# Altium PCB PCB1.PcbDoc (part 2 of 2)
Units mm, origin at the board's own origin, x right, y up, seen from the top; angles counter-clockwise.
Board outline 54.61 x 46.35 mm, 4 copper layers (Top Layer, Layer 1, Layer 2, Bottom Layer), stack 1.587 mm thick; 183 components, 132 nets, 434 pads, 125 vias.
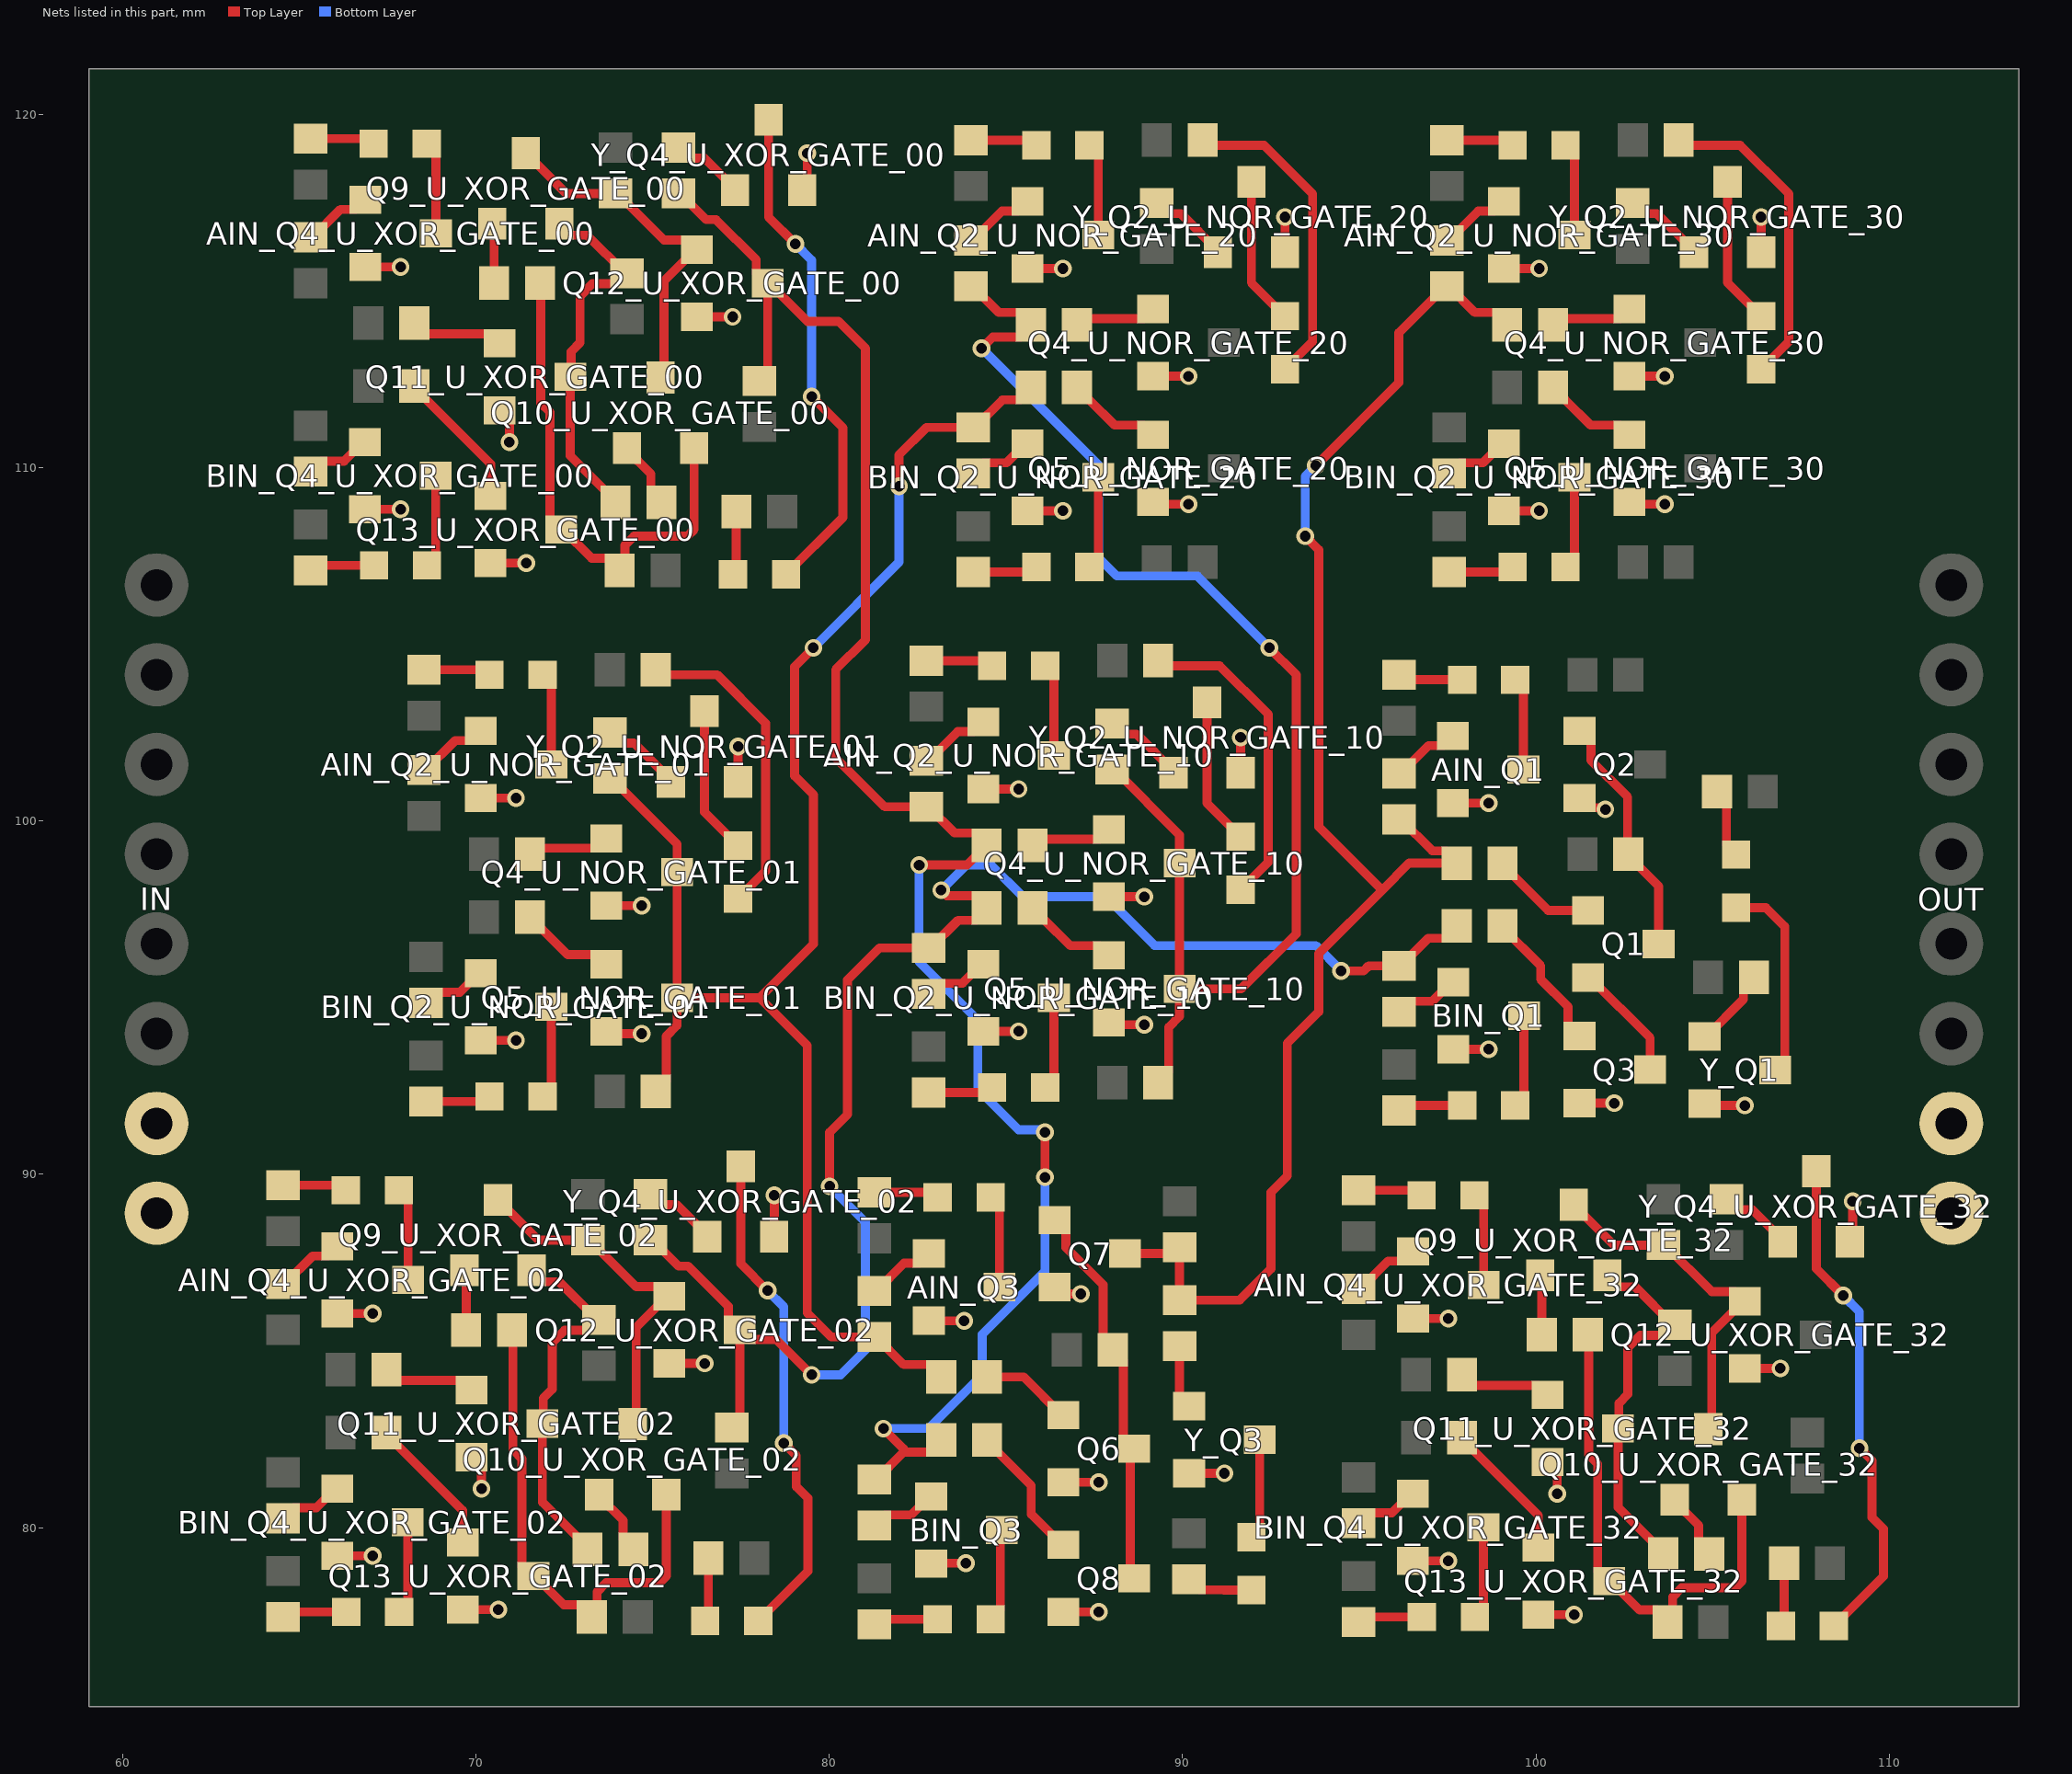
[diagram p4: the nets of this part, all layers, seen from the top]

## Via types
v1: diameter 0.5, hole 0.3, Top Layer to Bottom Layer, 125 vias

## Nets (pads, with @x,y where several pads share a name; then routed paths per layer and width w, separated by ;. In a path a pad name is that pad's centre, name@x,y a point inside that pad or via, vN(x,y) a via of type N, cw(c..) or ccw(c..) an arc to the next point about the centre after c; other vN are vias at no path point) (continued)
GND: AIN_Q1.2 AIN_Q2_U_NOR_GATE_01.2 AIN_Q2_U_NOR_GATE_10.2 AIN_Q2_U_NOR_GATE_20.2 AIN_Q2_U_NOR_GATE_30.2 AIN_Q3.2 AIN_Q4_U_XOR_GATE_00.2 AIN_Q4_U_XOR_GATE_02.2 AIN_Q4_U_XOR_GATE_32.2 BIN_Q1.2 BIN_Q2_U_NOR_GATE_01.2 BIN_Q2_U_NOR_GATE_10.2 BIN_Q2_U_NOR_GATE_20.2 BIN_Q2_U_NOR_GATE_30.2 BIN_Q3.2 BIN_Q4_U_XOR_GATE_00.2 BIN_Q4_U_XOR_GATE_02.2 BIN_Q4_U_XOR_GATE_32.2 IN.7 IN.8 OUT.7 OUT.8 Q2.2 Q3.2 Q4_U_NOR_GATE_01.2 Q4_U_NOR_GATE_10.2 Q4_U_NOR_GATE_20.2 Q4_U_NOR_GATE_30.2 Q5_U_NOR_GATE_01.2 Q5_U_NOR_GATE_10.2 Q5_U_NOR_GATE_20.2 Q5_U_NOR_GATE_30.2 Q6.2 Q7.2 Q8.2 Q11_U_XOR_GATE_00.2 Q11_U_XOR_GATE_02.2 Q11_U_XOR_GATE_32.2 Q12_U_XOR_GATE_00.2 Q12_U_XOR_GATE_02.2 Q12_U_XOR_GATE_32.2 Q13_U_XOR_GATE_00.2 Q13_U_XOR_GATE_02.2 Q13_U_XOR_GATE_32.2 Y_Q1.2 Y_Q2_U_NOR_GATE_01.2 Y_Q2_U_NOR_GATE_10.2 Y_Q2_U_NOR_GATE_20.2 Y_Q2_U_NOR_GATE_30.2 Y_Q3.2 Y_Q4_U_XOR_GATE_00.2 Y_Q4_U_XOR_GATE_02.2 Y_Q4_U_XOR_GATE_32.2 | length 49.5
  Top Layer w0.254: BIN_Q4_U_XOR_GATE_02.2@66.072,79.202 v1(67.08,79.202) ; AIN_Q4_U_XOR_GATE_02.2@66.08,86.06 v1(67.08,86.06) ; BIN_Q4_U_XOR_GATE_00.2@66.86,108.824 v1(67.868,108.824) ; AIN_Q4_U_XOR_GATE_00.2@66.868,115.682 v1(67.868,115.682) ; Q13_U_XOR_GATE_02.2@69.628,77.678 v1(70.636,77.678) ; Q11_U_XOR_GATE_02.2@69.882,81.996 69.887,81.996 70.16,81.723 v1(70.16,81.102) ; BIN_Q2_U_NOR_GATE_01.2@70.136,93.792 v1(71.136,93.792) ; AIN_Q2_U_NOR_GATE_01.2@70.136,100.65 v1(71.136,100.65) ; Q13_U_XOR_GATE_00.2@70.416,107.3 v1(71.424,107.3) ; Q11_U_XOR_GATE_00.2@70.67,111.618 70.675,111.618 70.948,111.345 v1(70.948,110.724) ; Q5_U_NOR_GATE_01.2@73.692,94.046 73.758,93.98 v1(74.692,93.98) ; Q4_U_NOR_GATE_01.2@73.692,97.602 v1(74.692,97.602) ; Q12_U_XOR_GATE_02.2@75.47,84.648 v1(76.478,84.648) ; Q12_U_XOR_GATE_00.2@76.258,114.27 v1(77.266,114.27) ; Y_Q2_U_NOR_GATE_01.2@77.42,101.108 v1(77.42,102.108) ; Y_Q4_U_XOR_GATE_02.2@78.444,88.23 78.436,88.238 78.444,88.246 v1(78.444,89.408) ; Y_Q4_U_XOR_GATE_00.2@79.232,117.852 79.224,117.86 79.379,118.015 v1(79.379,118.902) ; AIN_Q3.2@82.82,85.856 82.824,85.852 v1(83.82,85.852) ; BIN_Q3.2@82.886,78.982 82.898,78.994 v1(83.866,78.994) ; BIN_Q2_U_NOR_GATE_10.2@84.36,94.046 v1(85.36,94.046) ; AIN_Q2_U_NOR_GATE_10.2@84.36,100.904 v1(85.36,100.904) ; BIN_Q2_U_NOR_GATE_20.2@85.614,108.778 v1(86.614,108.778) ; AIN_Q2_U_NOR_GATE_20.2@85.614,115.636 v1(86.614,115.636) ; Q7.2@86.376,86.806 86.568,86.614 v1(87.122,86.614) ; Q8.2@86.63,77.616 v1(87.63,77.616) ; Q6.2@86.63,81.284 v1(87.63,81.284) ; Q5_U_NOR_GATE_10.2@87.916,94.3 87.982,94.234 v1(88.916,94.234) ; Q4_U_NOR_GATE_10.2@87.916,97.856 v1(88.916,97.856) ; Q5_U_NOR_GATE_20.2@89.17,109.032 89.236,108.966 v1(90.17,108.966) ; Q4_U_NOR_GATE_20.2@89.17,112.588 v1(90.17,112.588) ; Y_Q3.2@90.186,81.538 v1(91.186,81.538) ; Y_Q2_U_NOR_GATE_10.2@91.644,101.362 v1(91.644,102.362) ; Y_Q2_U_NOR_GATE_20.2@92.898,116.094 v1(92.898,117.094) ; BIN_Q4_U_XOR_GATE_32.2@96.516,79.06 v1(97.524,79.06) ; AIN_Q4_U_XOR_GATE_32.2@96.524,85.918 v1(97.524,85.918) ; AIN_Q1.2@97.648,100.508 v1(98.664,100.508) ; BIN_Q1.2@97.664,93.538 v1(98.664,93.538) ; BIN_Q2_U_NOR_GATE_30.2@99.092,108.778 v1(100.092,108.778) ; AIN_Q2_U_NOR_GATE_30.2@99.092,115.636 v1(100.092,115.636) ; Q13_U_XOR_GATE_32.2@100.072,77.536 v1(101.08,77.536) ; Q11_U_XOR_GATE_32.2@100.326,81.854 100.331,81.854 100.604,81.581 v1(100.604,80.96) ; Q3.2@101.236,92.014 v1(102.22,92.014) ; Q2.2@101.236,100.65 101.509,100.377 101.919,100.377 v1(101.966,100.33) ; Q5_U_NOR_GATE_30.2@102.648,109.032 102.714,108.966 v1(103.648,108.966) ; Q4_U_NOR_GATE_30.2@102.648,112.588 v1(103.648,112.588) ; Y_Q1.2@104.776,92.002 104.788,92.014 104.854,91.948 v1(105.914,91.948) ; Q12_U_XOR_GATE_32.2@105.914,84.506 v1(106.922,84.506) ; Y_Q2_U_NOR_GATE_30.2@106.376,116.094 v1(106.376,117.094) ; Y_Q4_U_XOR_GATE_32.2@108.888,88.088 108.88,88.096 108.966,88.182 v1(108.966,89.234)
NetAIN_D1_1: AIN_D1.1 AIN_RD1.2 | length 1.8
  Top Layer w0.254: AIN_RD1.2@96.124,104.14 96.266,103.998 AIN_D1.1@97.914,103.998
NetAIN_D1_2: AIN_D1.2 AIN_Q1.3 | length 2.6
  Top Layer w0.254: AIN_D1.2@99.414,103.998 99.648,103.764 AIN_Q1.3@99.648,101.458
NetAIN_D2_U_NOR_GATE_01_1: AIN_D2_U_NOR_GATE_01.1 AIN_RD2_U_NOR_GATE_01.2 | length 1.9
  Top Layer w0.254: AIN_RD2_U_NOR_GATE_01.2@68.53,104.282 70.244,104.282 AIN_D2_U_NOR_GATE_01.1@70.386,104.14
NetAIN_D2_U_NOR_GATE_01_2: AIN_D2_U_NOR_GATE_01.2 AIN_Q2_U_NOR_GATE_01.3 | length 2.6
  Top Layer w0.254: AIN_D2_U_NOR_GATE_01.2@71.886,104.14 72.136,103.89 AIN_Q2_U_NOR_GATE_01.3@72.136,101.6
NetAIN_D2_U_NOR_GATE_10_1: AIN_D2_U_NOR_GATE_10.1 AIN_RD2_U_NOR_GATE_10.2 | length 1.9
  Top Layer w0.254: AIN_RD2_U_NOR_GATE_10.2@82.754,104.536 84.468,104.536 AIN_D2_U_NOR_GATE_10.1@84.61,104.394
NetAIN_D2_U_NOR_GATE_10_2: AIN_D2_U_NOR_GATE_10.2 AIN_Q2_U_NOR_GATE_10.3 | length 2.6
  Top Layer w0.254: AIN_D2_U_NOR_GATE_10.2@86.11,104.394 86.36,104.144 AIN_Q2_U_NOR_GATE_10.3@86.36,101.854
NetAIN_D2_U_NOR_GATE_20_1: AIN_D2_U_NOR_GATE_20.1 AIN_RD2_U_NOR_GATE_20.2 | length 1.9
  Top Layer w0.254: AIN_RD2_U_NOR_GATE_20.2@84.008,119.268 85.722,119.268 AIN_D2_U_NOR_GATE_20.1@85.864,119.126
NetAIN_D2_U_NOR_GATE_20_2: AIN_D2_U_NOR_GATE_20.2 AIN_Q2_U_NOR_GATE_20.3 | length 2.6
  Top Layer w0.254: AIN_D2_U_NOR_GATE_20.2@87.364,119.126 87.614,118.876 AIN_Q2_U_NOR_GATE_20.3@87.614,116.586
NetAIN_D2_U_NOR_GATE_30_1: AIN_D2_U_NOR_GATE_30.1 AIN_RD2_U_NOR_GATE_30.2 | length 1.9
  Top Layer w0.254: AIN_RD2_U_NOR_GATE_30.2@97.486,119.268 99.2,119.268 AIN_D2_U_NOR_GATE_30.1@99.342,119.126
NetAIN_D2_U_NOR_GATE_30_2: AIN_D2_U_NOR_GATE_30.2 AIN_Q2_U_NOR_GATE_30.3 | length 2.6
  Top Layer w0.254: AIN_D2_U_NOR_GATE_30.2@100.842,119.126 101.092,118.876 AIN_Q2_U_NOR_GATE_30.3@101.092,116.586
NetAIN_D3_1: AIN_D3.1 AIN_RD3.2 | length 1.8
  Top Layer w0.254: AIN_RD3.2@81.28,89.488 82.928,89.488 AIN_D3.1@83.07,89.346
NetAIN_D3_2: AIN_D3.2 AIN_Q3.3 | length 2.6
  Top Layer w0.254: AIN_D3.2@84.57,89.346 84.82,89.096 AIN_Q3.3@84.82,86.806
NetAIN_D4_U_XOR_GATE_00_1: AIN_D4_U_XOR_GATE_00.1 AIN_RD4_U_XOR_GATE_00.2 | length 1.8
  Top Layer w0.254: AIN_RD4_U_XOR_GATE_00.2@65.328,119.314 66.964,119.314 AIN_D4_U_XOR_GATE_00.1@67.106,119.172
NetAIN_D4_U_XOR_GATE_00_2: AIN_D4_U_XOR_GATE_00.2 AIN_Q4_U_XOR_GATE_00.3 | length 2.6
  Top Layer w0.254: AIN_D4_U_XOR_GATE_00.2@68.606,119.172 68.868,118.91 AIN_Q4_U_XOR_GATE_00.3@68.868,116.632
NetAIN_D4_U_XOR_GATE_02_1: AIN_D4_U_XOR_GATE_02.1 AIN_RD4_U_XOR_GATE_02.2 | length 1.8
  Top Layer w0.254: AIN_RD4_U_XOR_GATE_02.2@64.54,89.692 66.176,89.692 AIN_D4_U_XOR_GATE_02.1@66.318,89.55
NetAIN_D4_U_XOR_GATE_02_2: AIN_D4_U_XOR_GATE_02.2 AIN_Q4_U_XOR_GATE_02.3 | length 2.6
  Top Layer w0.254: AIN_D4_U_XOR_GATE_02.2@67.818,89.55 68.08,89.288 AIN_Q4_U_XOR_GATE_02.3@68.08,87.01
NetAIN_D4_U_XOR_GATE_32_1: AIN_D4_U_XOR_GATE_32.1 AIN_RD4_U_XOR_GATE_32.2 | length 1.8
  Top Layer w0.254: AIN_RD4_U_XOR_GATE_32.2@94.984,89.55 96.62,89.55 AIN_D4_U_XOR_GATE_32.1@96.762,89.408
NetAIN_D4_U_XOR_GATE_32_2: AIN_D4_U_XOR_GATE_32.2 AIN_Q4_U_XOR_GATE_32.3 | length 2.6
  Top Layer w0.254: AIN_D4_U_XOR_GATE_32.2@98.262,89.408 98.524,89.146 AIN_Q4_U_XOR_GATE_32.3@98.524,86.868
NetAIN_Q1_1: AIN_Q1.1 AIN_R1.1 | length 2
  Top Layer w0.254: AIN_R1.1@96.124,101.346 96.174,101.346 96.963,102.135 97.375,102.135 AIN_Q1.1@97.648,102.408
NetAIN_Q2_U_NOR_GATE_01_1: AIN_Q2_U_NOR_GATE_01.1 AIN_R2_U_NOR_GATE_01.1 | length 2.1
  Top Layer w0.254: AIN_R2_U_NOR_GATE_01.1@68.53,101.446 68.58,101.446 69.411,102.277 69.863,102.277 AIN_Q2_U_NOR_GATE_01.1@70.136,102.55
NetAIN_Q2_U_NOR_GATE_10_1: AIN_Q2_U_NOR_GATE_10.1 AIN_R2_U_NOR_GATE_10.1 | length 2.1
  Top Layer w0.254: AIN_R2_U_NOR_GATE_10.1@82.754,101.7 82.804,101.7 83.635,102.531 84.087,102.531 AIN_Q2_U_NOR_GATE_10.1@84.36,102.804
NetAIN_Q2_U_NOR_GATE_20_1: AIN_Q2_U_NOR_GATE_20.1 AIN_R2_U_NOR_GATE_20.1 | length 2.1
  Top Layer w0.254: AIN_R2_U_NOR_GATE_20.1@84.008,116.432 84.058,116.432 84.889,117.263 85.341,117.263 AIN_Q2_U_NOR_GATE_20.1@85.614,117.536
NetAIN_Q2_U_NOR_GATE_30_1: AIN_Q2_U_NOR_GATE_30.1 AIN_R2_U_NOR_GATE_30.1 | length 2.1
  Top Layer w0.254: AIN_R2_U_NOR_GATE_30.1@97.486,116.432 97.536,116.432 98.367,117.263 98.819,117.263 AIN_Q2_U_NOR_GATE_30.1@99.092,117.536
NetAIN_Q3_1: AIN_Q3.1 AIN_R3.1 | length 2
  Top Layer w0.254: AIN_R3.1@81.28,86.694 81.33,86.694 82.119,87.483 82.547,87.483 AIN_Q3.1@82.82,87.756
NetAIN_Q4_U_XOR_GATE_00_1: AIN_Q4_U_XOR_GATE_00.1 AIN_R4_U_XOR_GATE_00.1 | length 2
  Top Layer w0.254: AIN_R4_U_XOR_GATE_00.1@65.328,116.52 65.378,116.52 66.167,117.309 66.595,117.309 AIN_Q4_U_XOR_GATE_00.1@66.868,117.582
NetAIN_Q4_U_XOR_GATE_02_1: AIN_Q4_U_XOR_GATE_02.1 AIN_R4_U_XOR_GATE_02.1 | length 2
  Top Layer w0.254: AIN_R4_U_XOR_GATE_02.1@64.54,86.898 64.59,86.898 65.379,87.687 65.807,87.687 AIN_Q4_U_XOR_GATE_02.1@66.08,87.96
NetAIN_Q4_U_XOR_GATE_32_1: AIN_Q4_U_XOR_GATE_32.1 AIN_R4_U_XOR_GATE_32.1 | length 2
  Top Layer w0.254: AIN_R4_U_XOR_GATE_32.1@94.984,86.756 95.034,86.756 95.823,87.545 96.251,87.545 AIN_Q4_U_XOR_GATE_32.1@96.524,87.818
NetAIN_R1_2: AIN_R1.2 AIN_R2_U_NOR_GATE_30.2 Q7.3 R2.1 R4_U_NOR_GATE_30.1 RO3.1 Y_R3.2 | length 44.6
  Top Layer w0.254: Q7.3@88.376,87.756 89.738,87.756 RO3.1@89.916,87.934 Y_R3.2@89.916,86.44 91.616,86.44 92.502,87.326 92.502,89.488 92.964,89.95 92.964,93.707 93.857,94.6 93.857,96.251 95.65,98.044 ; v1(93.472,108.062) 93.857,107.677 93.857,99.837 95.65,98.044 ; v1(93.773,110.06) 96.124,112.411 96.124,113.82 97.436,115.132 AIN_R2_U_NOR_GATE_30.2@97.486,115.132 97.536,115.132 98.274,114.394 98.89,114.394 99.188,114.096 R4_U_NOR_GATE_30.1@99.188,114.046 ; AIN_R1.2@96.124,100.046 96.174,100.046 97.066,99.154 97.462,99.154 97.76,98.856 R2.1@97.76,98.806 96.412,98.806 95.65,98.044
  Bottom Layer w0.254: v1(93.472,108.062) 93.472,109.759 v1(93.773,110.06)
NetAIN_R2_U_NOR_GATE_10_2: AIN_R2_U_NOR_GATE_10.2 BIN_R3.2 Q12_U_XOR_GATE_00.3 R4_U_NOR_GATE_10.1 R8.1 R10_U_XOR_GATE_00.1 Y_R4_U_XOR_GATE_00.2 | length 53.4
  Top Layer w0.254: Y_R4_U_XOR_GATE_00.2@75.734,117.76 75.784,117.76 76.523,117.021 76.796,117.021 77.935,115.882 77.935,115.493 78.208,115.22 Q12_U_XOR_GATE_00.3@78.258,115.22 ; R10_U_XOR_GATE_00.1@78.028,112.456 78.258,112.686 Q12_U_XOR_GATE_00.3@78.258,115.22 ; BIN_R3.2@81.28,81.36 81.33,81.36 82.11,82.14 ; v1(81.534,82.804) 82.11,82.228 82.11,82.14 ; v1(82.547,98.756) 83.898,98.756 84.108,98.966 84.158,98.966 84.456,99.264 R4_U_NOR_GATE_10.1@84.456,99.314 84.456,99.364 84.158,99.662 83.542,99.662 82.804,100.4 AIN_R2_U_NOR_GATE_10.2@82.754,100.4 81.576,100.4 80.183,101.793 80.183,104.282 81.026,105.125 81.026,113.38 80.264,114.142 79.386,114.142 78.308,115.22 Q12_U_XOR_GATE_00.3@78.258,115.22 ; R8.1@83.17,82.488 83.17,82.438 82.872,82.14 82.11,82.14 ; v1(86.106,89.916) v1(86.106,91.186)
  Bottom Layer w0.254: v1(81.534,82.804) 82.807,82.804 84.328,84.325 84.328,85.468 86.106,87.246 v1(86.106,89.916) ; v1(82.547,98.756) 82.539,98.748 82.539,96.023 84.209,94.353 84.209,92.411 85.36,91.26 86.032,91.26 v1(86.106,91.186)
NetAIN_R2_U_NOR_GATE_20_2: AIN_R2_U_NOR_GATE_20.2 Q4_U_NOR_GATE_10.3 Q5_U_NOR_GATE_10.3 R4_U_NOR_GATE_20.1 RO2_U_NOR_GATE_10.1 Y_R2_U_NOR_GATE_10.2 | length 39.4
  Top Layer w0.254: AIN_R2_U_NOR_GATE_20.2@84.008,115.132 84.058,115.132 84.796,114.394 85.412,114.394 85.71,114.096 R4_U_NOR_GATE_20.1@85.71,114.046 85.71,113.996 85.412,113.698 84.628,113.698 v1(84.31,113.38) ; Y_R2_U_NOR_GATE_10.2@88.012,101.458 88.062,101.458 89.916,99.604 Q4_U_NOR_GATE_10.3@89.916,98.806 Q5_U_NOR_GATE_10.3@89.916,95.25 ; RO2_U_NOR_GATE_10.1@89.312,92.598 89.61,92.896 89.61,94.163 89.916,94.469 Q5_U_NOR_GATE_10.3@89.916,95.25 ; v1(92.456,104.902) 93.218,104.14 93.218,96.805 91.663,95.25 Q5_U_NOR_GATE_10.3@89.916,95.25
  Bottom Layer w0.254: v1(84.31,113.38) 87.63,110.06 87.63,107.442 88.138,106.934 90.424,106.934 v1(92.456,104.902)
NetAIN_R3_2: AIN_R3.2 BIN_R2_U_NOR_GATE_20.2 Q4_U_NOR_GATE_01.3 Q5_U_NOR_GATE_01.3 R5_U_NOR_GATE_20.1 R6.1 RO2_U_NOR_GATE_01.1 Y_R2_U_NOR_GATE_01.2 | length 48.3
  Top Layer w0.254: Y_R2_U_NOR_GATE_01.2@73.788,101.204 73.838,101.204 75.692,99.35 Q4_U_NOR_GATE_01.3@75.692,98.552 Q5_U_NOR_GATE_01.3@75.692,94.996 ; RO2_U_NOR_GATE_01.1@75.088,92.344 75.386,92.642 75.386,93.909 75.692,94.215 Q5_U_NOR_GATE_01.3@75.692,94.996 ; v1(79.552,104.902) 79.018,104.368 79.018,101.277 79.552,100.743 79.552,96.52 78.028,94.996 ; v1(81.976,109.474) 81.976,110.361 82.755,111.14 BIN_R2_U_NOR_GATE_20.2@84.07,111.14 84.12,111.14 84.9,111.92 85.412,111.92 85.71,112.218 R5_U_NOR_GATE_20.1@85.71,112.268 ; R6.1@83.17,84.266 83.17,84.316 82.872,84.614 82.11,84.614 81.33,85.394 AIN_R3.2@81.28,85.394 80.058,85.394 79.379,86.073 79.379,93.645 78.028,94.996 ; Q5_U_NOR_GATE_01.3@75.692,94.996 78.028,94.996
  Bottom Layer w0.254: v1(79.552,104.902) 81.976,107.326 v1(81.976,109.474)
NetBIN_D1_1: BIN_D1.1 BIN_RD1.2 | length 1.8
  Top Layer w0.254: BIN_RD1.2@96.124,91.806 96.266,91.948 BIN_D1.1@97.914,91.948
NetBIN_D1_2: BIN_D1.2 BIN_Q1.3 | length 2.6
  Top Layer w0.254: BIN_D1.2@99.414,91.948 99.664,92.198 BIN_Q1.3@99.664,94.488
NetBIN_D2_U_NOR_GATE_01_1: BIN_D2_U_NOR_GATE_01.1 BIN_RD2_U_NOR_GATE_01.2 | length 1.9
  Top Layer w0.254: BIN_RD2_U_NOR_GATE_01.2@68.592,92.06 70.244,92.06 BIN_D2_U_NOR_GATE_01.1@70.386,92.202
NetBIN_D2_U_NOR_GATE_01_2: BIN_D2_U_NOR_GATE_01.2 BIN_Q2_U_NOR_GATE_01.3 | length 2.6
  Top Layer w0.254: BIN_D2_U_NOR_GATE_01.2@71.886,92.202 72.136,92.452 BIN_Q2_U_NOR_GATE_01.3@72.136,94.742
NetBIN_D2_U_NOR_GATE_10_1: BIN_D2_U_NOR_GATE_10.1 BIN_RD2_U_NOR_GATE_10.2 | length 1.9
  Top Layer w0.254: BIN_RD2_U_NOR_GATE_10.2@82.816,92.314 84.468,92.314 BIN_D2_U_NOR_GATE_10.1@84.61,92.456
NetBIN_D2_U_NOR_GATE_10_2: BIN_D2_U_NOR_GATE_10.2 BIN_Q2_U_NOR_GATE_10.3 | length 2.6
  Top Layer w0.254: BIN_D2_U_NOR_GATE_10.2@86.11,92.456 86.36,92.706 BIN_Q2_U_NOR_GATE_10.3@86.36,94.996
NetBIN_D2_U_NOR_GATE_20_1: BIN_D2_U_NOR_GATE_20.1 BIN_RD2_U_NOR_GATE_20.2 | length 1.9
  Top Layer w0.254: BIN_RD2_U_NOR_GATE_20.2@84.07,107.046 85.722,107.046 BIN_D2_U_NOR_GATE_20.1@85.864,107.188
NetBIN_D2_U_NOR_GATE_20_2: BIN_D2_U_NOR_GATE_20.2 BIN_Q2_U_NOR_GATE_20.3 | length 2.6
  Top Layer w0.254: BIN_D2_U_NOR_GATE_20.2@87.364,107.188 87.614,107.438 BIN_Q2_U_NOR_GATE_20.3@87.614,109.728
NetBIN_D2_U_NOR_GATE_30_1: BIN_D2_U_NOR_GATE_30.1 BIN_RD2_U_NOR_GATE_30.2 | length 1.9
  Top Layer w0.254: BIN_RD2_U_NOR_GATE_30.2@97.548,107.046 99.2,107.046 BIN_D2_U_NOR_GATE_30.1@99.342,107.188
NetBIN_D2_U_NOR_GATE_30_2: BIN_D2_U_NOR_GATE_30.2 BIN_Q2_U_NOR_GATE_30.3 | length 2.6
  Top Layer w0.254: BIN_D2_U_NOR_GATE_30.2@100.842,107.188 101.092,107.438 BIN_Q2_U_NOR_GATE_30.3@101.092,109.728
NetBIN_D3_1: BIN_D3.1 BIN_RD3.2 | length 1.8
  Top Layer w0.254: BIN_RD3.2@81.28,77.266 81.422,77.408 BIN_D3.1@83.07,77.408
NetBIN_D3_2: BIN_D3.2 BIN_Q3.3 | length 2.7
  Top Layer w0.254: BIN_D3.2@84.57,77.408 84.843,77.681 84.843,79.889 BIN_Q3.3@84.886,79.932
NetBIN_D4_U_XOR_GATE_00_1: BIN_D4_U_XOR_GATE_00.1 BIN_RD4_U_XOR_GATE_00.2 | length 1.8
  Top Layer w0.254: BIN_RD4_U_XOR_GATE_00.2@65.328,107.092 65.47,107.234 BIN_D4_U_XOR_GATE_00.1@67.118,107.234
NetBIN_D4_U_XOR_GATE_00_2: BIN_D4_U_XOR_GATE_00.2 BIN_Q4_U_XOR_GATE_00.3 | length 2.6
  Top Layer w0.254: BIN_D4_U_XOR_GATE_00.2@68.618,107.234 68.86,107.476 BIN_Q4_U_XOR_GATE_00.3@68.86,109.774
NetBIN_D4_U_XOR_GATE_02_1: BIN_D4_U_XOR_GATE_02.1 BIN_RD4_U_XOR_GATE_02.2 | length 1.8
  Top Layer w0.254: BIN_RD4_U_XOR_GATE_02.2@64.54,77.47 64.682,77.612 BIN_D4_U_XOR_GATE_02.1@66.33,77.612
NetBIN_D4_U_XOR_GATE_02_2: BIN_D4_U_XOR_GATE_02.2 BIN_Q4_U_XOR_GATE_02.3 | length 2.6
  Top Layer w0.254: BIN_D4_U_XOR_GATE_02.2@67.83,77.612 68.072,77.854 BIN_Q4_U_XOR_GATE_02.3@68.072,80.152
NetBIN_D4_U_XOR_GATE_32_1: BIN_D4_U_XOR_GATE_32.1 BIN_RD4_U_XOR_GATE_32.2 | length 1.8
  Top Layer w0.254: BIN_RD4_U_XOR_GATE_32.2@94.984,77.328 95.126,77.47 BIN_D4_U_XOR_GATE_32.1@96.774,77.47
NetBIN_D4_U_XOR_GATE_32_2: BIN_D4_U_XOR_GATE_32.2 BIN_Q4_U_XOR_GATE_32.3 | length 2.6
  Top Layer w0.254: BIN_D4_U_XOR_GATE_32.2@98.274,77.47 98.516,77.712 BIN_Q4_U_XOR_GATE_32.3@98.516,80.01
NetBIN_Q1_1: BIN_Q1.1 BIN_R1.1 | length 1.9
  Top Layer w0.254: BIN_R1.1@96.124,94.6 96.422,94.898 97.074,94.898 97.614,95.438 BIN_Q1.1@97.664,95.438
NetBIN_Q2_U_NOR_GATE_01_1: BIN_Q2_U_NOR_GATE_01.1 BIN_R2_U_NOR_GATE_01.1 | length 1.9
  Top Layer w0.254: BIN_R2_U_NOR_GATE_01.1@68.592,94.854 68.89,95.152 69.546,95.152 70.086,95.692 BIN_Q2_U_NOR_GATE_01.1@70.136,95.692
NetBIN_Q2_U_NOR_GATE_10_1: BIN_Q2_U_NOR_GATE_10.1 BIN_R2_U_NOR_GATE_10.1 | length 1.9
  Top Layer w0.254: BIN_R2_U_NOR_GATE_10.1@82.816,95.108 83.114,95.406 83.77,95.406 84.31,95.946 BIN_Q2_U_NOR_GATE_10.1@84.36,95.946
NetBIN_Q2_U_NOR_GATE_20_1: BIN_Q2_U_NOR_GATE_20.1 BIN_R2_U_NOR_GATE_20.1 | length 1.9
  Top Layer w0.254: BIN_R2_U_NOR_GATE_20.1@84.07,109.84 84.368,110.138 85.024,110.138 85.564,110.678 BIN_Q2_U_NOR_GATE_20.1@85.614,110.678
NetBIN_Q2_U_NOR_GATE_30_1: BIN_Q2_U_NOR_GATE_30.1 BIN_R2_U_NOR_GATE_30.1 | length 1.9
  Top Layer w0.254: BIN_R2_U_NOR_GATE_30.1@97.548,109.84 97.846,110.138 98.502,110.138 99.042,110.678 BIN_Q2_U_NOR_GATE_30.1@99.092,110.678
NetBIN_Q3_1: BIN_Q3.1 BIN_R3.1 | length 1.9
  Top Layer w0.254: BIN_R3.1@81.28,80.06 81.578,80.358 82.312,80.358 82.836,80.882 BIN_Q3.1@82.886,80.882
NetBIN_Q4_U_XOR_GATE_00_1: BIN_Q4_U_XOR_GATE_00.1 BIN_R4_U_XOR_GATE_00.1 | length 1.9
  Top Layer w0.254: BIN_R4_U_XOR_GATE_00.1@65.328,109.886 65.626,110.184 66.27,110.184 66.81,110.724 BIN_Q4_U_XOR_GATE_00.1@66.86,110.724
NetBIN_Q4_U_XOR_GATE_02_1: BIN_Q4_U_XOR_GATE_02.1 BIN_R4_U_XOR_GATE_02.1 | length 1.9
  Top Layer w0.254: BIN_R4_U_XOR_GATE_02.1@64.54,80.264 64.838,80.562 65.482,80.562 66.022,81.102 BIN_Q4_U_XOR_GATE_02.1@66.072,81.102
NetBIN_Q4_U_XOR_GATE_32_1: BIN_Q4_U_XOR_GATE_32.1 BIN_R4_U_XOR_GATE_32.1 | length 1.9
  Top Layer w0.254: BIN_R4_U_XOR_GATE_32.1@94.984,80.122 95.282,80.42 95.926,80.42 96.466,80.96 BIN_Q4_U_XOR_GATE_32.1@96.516,80.96
NetBIN_R1_2: BIN_R1.2 BIN_R2_U_NOR_GATE_10.2 Q12_U_XOR_GATE_02.3 R3.1 R5_U_NOR_GATE_10.1 R10_U_XOR_GATE_02.1 Y_R4_U_XOR_GATE_02.2 | length 45.2
  Top Layer w0.254: Y_R4_U_XOR_GATE_02.2@74.946,88.138 74.996,88.138 75.735,87.399 76.008,87.399 77.147,86.26 77.147,85.871 77.42,85.598 Q12_U_XOR_GATE_02.3@77.47,85.598 ; R10_U_XOR_GATE_02.1@77.24,82.834 77.47,83.064 Q12_U_XOR_GATE_02.3@77.47,85.598 ; v1(79.502,84.325) 78.502,85.325 77.743,85.325 Q12_U_XOR_GATE_02.3@77.47,85.598 ; v1(80.01,89.662) 80.01,91.186 80.518,91.694 80.518,95.504 81.422,96.408 BIN_R2_U_NOR_GATE_10.2@82.816,96.408 82.866,96.408 83.646,97.188 84.158,97.188 84.456,97.486 R5_U_NOR_GATE_10.1@84.456,97.536 84.456,97.586 84.158,97.884 83.33,97.884 v1(83.17,98.044) ; v1(94.488,95.758) 95.126,95.758 95.268,95.9 BIN_R1.2@96.124,95.9 96.174,95.9 96.954,96.68 97.462,96.68 97.76,96.978 R3.1@97.76,97.028
  Bottom Layer w0.254: v1(79.502,84.325) 80.323,84.325 81.026,85.028 81.026,88.646 v1(80.01,89.662) ; v1(83.17,98.044) 83.882,98.756 84.582,98.756 85.482,97.856 87.828,97.856 89.21,96.473 93.773,96.473 v1(94.488,95.758)
NetQ1_1: Q1.1 R2.2 | length 3
  Top Layer w0.254: R2.2@99.06,98.806 99.06,98.756 100.346,97.47 Q1.1@101.474,97.47
NetQ1_2: Q1.2 Q3.3 | length 3.4
  Top Layer w0.254: Q1.2@101.474,95.57 101.524,95.57 103.236,93.858 Q3.3@103.236,92.964
NetQ1_3: Q1.3 Q2.1 R1.1 | length 7
  Top Layer w0.254: Q2.1@101.236,102.55 101.286,102.55 101.559,102.277 101.559,101.716 102.597,100.678 102.597,99.029 103.474,98.152 Q1.3@103.474,96.52
NetQ3_1: Q3.1 R3.2 | length 4
  Top Layer w0.254: R3.2@99.06,97.028 99.06,96.978 100.135,95.903 100.135,95.52 100.913,94.742 100.913,94.187 101.186,93.914 Q3.1@101.236,93.914
NetQ4_U_NOR_GATE_01_1: Q4_U_NOR_GATE_01.1 R4_U_NOR_GATE_01.2 | length 2.3
  Top Layer w0.254: R4_U_NOR_GATE_01.2@71.532,99.06 71.701,99.229 73.419,99.229 Q4_U_NOR_GATE_01.1@73.692,99.502
NetQ4_U_NOR_GATE_10_1: Q4_U_NOR_GATE_10.1 R4_U_NOR_GATE_10.2 | length 2.3
  Top Layer w0.254: R4_U_NOR_GATE_10.2@85.756,99.314 85.925,99.483 87.643,99.483 Q4_U_NOR_GATE_10.1@87.916,99.756
NetQ4_U_NOR_GATE_20_1: Q4_U_NOR_GATE_20.1 R4_U_NOR_GATE_20.2 | length 2.3
  Top Layer w0.254: R4_U_NOR_GATE_20.2@87.01,114.046 87.179,114.215 88.897,114.215 Q4_U_NOR_GATE_20.1@89.17,114.488
NetQ4_U_NOR_GATE_30_1: Q4_U_NOR_GATE_30.1 R4_U_NOR_GATE_30.2 | length 2.3
  Top Layer w0.254: R4_U_NOR_GATE_30.2@100.488,114.046 100.657,114.215 102.375,114.215 Q4_U_NOR_GATE_30.1@102.648,114.488
NetQ5_U_NOR_GATE_01_1: Q5_U_NOR_GATE_01.1 R5_U_NOR_GATE_01.2 | length 2.7
  Top Layer w0.254: R5_U_NOR_GATE_01.2@71.532,97.282 71.532,97.232 71.83,96.934 71.88,96.934 72.595,96.219 73.419,96.219 Q5_U_NOR_GATE_01.1@73.692,95.946
NetQ5_U_NOR_GATE_10_1: Q5_U_NOR_GATE_10.1 R5_U_NOR_GATE_10.2 | length 2.7
  Top Layer w0.254: R5_U_NOR_GATE_10.2@85.756,97.536 85.756,97.486 86.054,97.188 86.104,97.188 86.819,96.473 87.643,96.473 Q5_U_NOR_GATE_10.1@87.916,96.2
NetQ5_U_NOR_GATE_20_1: Q5_U_NOR_GATE_20.1 R5_U_NOR_GATE_20.2 | length 2.7
  Top Layer w0.254: R5_U_NOR_GATE_20.2@87.01,112.268 87.01,112.218 87.308,111.92 87.358,111.92 88.073,111.205 88.897,111.205 Q5_U_NOR_GATE_20.1@89.17,110.932
NetQ5_U_NOR_GATE_30_1: Q5_U_NOR_GATE_30.1 R5_U_NOR_GATE_30.2 | length 2.7
  Top Layer w0.254: R5_U_NOR_GATE_30.2@100.488,112.268 100.488,112.218 100.786,111.92 100.836,111.92 101.551,111.205 102.375,111.205 Q5_U_NOR_GATE_30.1@102.648,110.932
NetQ6_1: Q6.1 R6.2 | length 2.6
  Top Layer w0.254: R6.2@84.47,84.266 85.498,84.266 86.58,83.184 Q6.1@86.63,83.184
NetQ6_3: Q6.3 Q7.1 Q8.3 R7.1 | length 11.2
  Top Layer w0.254: Q7.1@86.376,88.706 86.426,88.706 86.699,88.433 86.699,87.929 87.753,86.875 87.753,85.301 R7.1@88.026,85.028 88.324,84.73 88.324,82.507 88.597,82.234 Q6.3@88.63,82.234 88.523,82.127 88.523,78.673 Q8.3@88.63,78.566
NetQ8_1: Q8.1 R8.2 | length 3.9
  Top Layer w0.254: R8.2@84.47,82.488 84.47,82.438 85.717,81.191 85.717,80.379 86.58,79.516 Q8.1@86.63,79.516
NetQ9_U_XOR_GATE_00_1: Q9_U_XOR_GATE_00.1 R11_U_XOR_GATE_00.2 | length 1.7
  Top Layer w0.254: Q9_U_XOR_GATE_00.1@70.466,116.902 70.512,116.856 R11_U_XOR_GATE_00.2@70.512,115.22
NetQ9_U_XOR_GATE_00_2: Q9_U_XOR_GATE_00.2 Q11_U_XOR_GATE_00.3 R12_U_XOR_GATE_00.1 R13_U_XOR_GATE_00.1 | length 10.6
  Top Layer w0.254: Q9_U_XOR_GATE_00.2@72.366,116.902 72.366,116.852 72.639,116.579 73.151,116.579 74.226,115.504 R13_U_XOR_GATE_00.1@74.276,115.504 73.978,115.206 73.295,115.206 72.948,114.859 72.948,113.538 72.694,113.284 72.694,112.592 Q11_U_XOR_GATE_00.3@72.67,112.568 72.67,110.341 73.949,109.062 R12_U_XOR_GATE_00.1@73.949,109.012
NetQ9_U_XOR_GATE_00_3: Q9_U_XOR_GATE_00.3 Q10_U_XOR_GATE_00.3 Q12_U_XOR_GATE_00.1 R9_U_XOR_GATE_00.1 | length 10.1
  Top Layer w0.254: Q9_U_XOR_GATE_00.3@71.416,118.902 71.416,118.852 71.689,118.579 71.739,118.579 72.558,117.76 R9_U_XOR_GATE_00.1@73.956,117.76 74.006,117.76 75.323,116.443 75.985,116.443 Q12_U_XOR_GATE_00.1@76.258,116.17 76.208,116.17 75.323,115.285 75.323,112.649 Q10_U_XOR_GATE_00.3@75.226,112.552
NetQ9_U_XOR_GATE_02_1: Q9_U_XOR_GATE_02.1 R11_U_XOR_GATE_02.2 | length 1.7
  Top Layer w0.254: Q9_U_XOR_GATE_02.1@69.678,87.28 69.724,87.234 R11_U_XOR_GATE_02.2@69.724,85.598
NetQ9_U_XOR_GATE_02_2: Q9_U_XOR_GATE_02.2 Q11_U_XOR_GATE_02.3 R12_U_XOR_GATE_02.1 R13_U_XOR_GATE_02.1 | length 10.6
  Top Layer w0.254: Q9_U_XOR_GATE_02.2@71.578,87.28 71.578,87.23 71.851,86.957 72.363,86.957 73.438,85.882 R13_U_XOR_GATE_02.1@73.488,85.882 73.19,85.584 72.507,85.584 72.16,85.237 72.16,83.916 71.906,83.662 71.906,82.97 Q11_U_XOR_GATE_02.3@71.882,82.946 71.882,80.719 73.161,79.44 R12_U_XOR_GATE_02.1@73.161,79.39
NetQ9_U_XOR_GATE_02_3: Q9_U_XOR_GATE_02.3 Q10_U_XOR_GATE_02.3 Q12_U_XOR_GATE_02.1 R9_U_XOR_GATE_02.1 | length 10.1
  Top Layer w0.254: Q9_U_XOR_GATE_02.3@70.628,89.28 70.628,89.23 70.901,88.957 70.951,88.957 71.77,88.138 R9_U_XOR_GATE_02.1@73.168,88.138 73.218,88.138 74.535,86.821 75.197,86.821 Q12_U_XOR_GATE_02.1@75.47,86.548 75.42,86.548 74.535,85.663 74.535,83.027 Q10_U_XOR_GATE_02.3@74.438,82.93
NetQ9_U_XOR_GATE_32_1: Q9_U_XOR_GATE_32.1 R11_U_XOR_GATE_32.2 | length 1.7
  Top Layer w0.254: Q9_U_XOR_GATE_32.1@100.122,87.138 100.168,87.092 R11_U_XOR_GATE_32.2@100.168,85.456
NetQ9_U_XOR_GATE_32_2: Q9_U_XOR_GATE_32.2 Q11_U_XOR_GATE_32.3 R12_U_XOR_GATE_32.1 R13_U_XOR_GATE_32.1 | length 10.6
  Top Layer w0.254: Q9_U_XOR_GATE_32.2@102.022,87.138 102.022,87.088 102.295,86.815 102.807,86.815 103.882,85.74 R13_U_XOR_GATE_32.1@103.932,85.74 103.634,85.442 102.951,85.442 102.604,85.095 102.604,83.774 102.35,83.52 102.35,82.828 Q11_U_XOR_GATE_32.3@102.326,82.804 102.326,80.577 103.605,79.298 R12_U_XOR_GATE_32.1@103.605,79.248
NetQ9_U_XOR_GATE_32_3: Q9_U_XOR_GATE_32.3 Q10_U_XOR_GATE_32.3 Q12_U_XOR_GATE_32.1 R9_U_XOR_GATE_32.1 | length 10.1
  Top Layer w0.254: Q9_U_XOR_GATE_32.3@101.072,89.138 101.072,89.088 101.345,88.815 101.395,88.815 102.214,87.996 R9_U_XOR_GATE_32.1@103.612,87.996 103.662,87.996 104.979,86.679 105.641,86.679 Q12_U_XOR_GATE_32.1@105.914,86.406 105.864,86.406 104.979,85.521 104.979,82.885 Q10_U_XOR_GATE_32.3@104.882,82.788
NetQ10_U_XOR_GATE_00_1: Q10_U_XOR_GATE_00.1 R12_U_XOR_GATE_00.2 | length 1.9
  Top Layer w0.254: Q10_U_XOR_GATE_00.1@74.276,110.552 74.276,110.502 74.951,109.827 74.951,109.31 R12_U_XOR_GATE_00.2@75.249,109.012
NetQ10_U_XOR_GATE_00_2: Q10_U_XOR_GATE_00.2 Q13_U_XOR_GATE_00.3 R11_U_XOR_GATE_00.1 R14_U_XOR_GATE_00.1 | length 14.6
  Top Layer w0.254: R11_U_XOR_GATE_00.1@71.812,115.22 71.839,115.193 71.839,111.825 72.093,111.571 72.093,108.523 72.366,108.25 Q13_U_XOR_GATE_00.3@72.416,108.25 72.466,108.25 73.276,107.44 73.77,107.44 74.068,107.142 R14_U_XOR_GATE_00.1@74.068,107.092 74.218,107.242 74.218,107.808 74.472,108.062 75.988,108.062 76.176,108.25 Q10_U_XOR_GATE_00.2@76.176,110.552
NetQ10_U_XOR_GATE_02_1: Q10_U_XOR_GATE_02.1 R12_U_XOR_GATE_02.2 | length 1.9
  Top Layer w0.254: Q10_U_XOR_GATE_02.1@73.488,80.93 73.488,80.88 74.163,80.205 74.163,79.688 R12_U_XOR_GATE_02.2@74.461,79.39
NetQ10_U_XOR_GATE_02_2: Q10_U_XOR_GATE_02.2 Q13_U_XOR_GATE_02.3 R11_U_XOR_GATE_02.1 R14_U_XOR_GATE_02.1 | length 14.6
  Top Layer w0.254: R11_U_XOR_GATE_02.1@71.024,85.598 71.051,85.571 71.051,82.203 71.305,81.949 71.305,78.901 71.578,78.628 Q13_U_XOR_GATE_02.3@71.628,78.628 71.678,78.628 72.488,77.818 72.982,77.818 73.28,77.52 R14_U_XOR_GATE_02.1@73.28,77.47 73.43,77.62 73.43,78.186 73.684,78.44 75.2,78.44 75.388,78.628 Q10_U_XOR_GATE_02.2@75.388,80.93
NetQ10_U_XOR_GATE_32_1: Q10_U_XOR_GATE_32.1 R12_U_XOR_GATE_32.2 | length 1.9
  Top Layer w0.254: Q10_U_XOR_GATE_32.1@103.932,80.788 103.932,80.738 104.607,80.063 104.607,79.546 R12_U_XOR_GATE_32.2@104.905,79.248
NetQ10_U_XOR_GATE_32_2: Q10_U_XOR_GATE_32.2 Q13_U_XOR_GATE_32.3 R11_U_XOR_GATE_32.1 R14_U_XOR_GATE_32.1 | length 14.6
  Top Layer w0.254: R11_U_XOR_GATE_32.1@101.468,85.456 101.495,85.429 101.495,82.061 101.749,81.807 101.749,78.759 102.022,78.486 Q13_U_XOR_GATE_32.3@102.072,78.486 102.122,78.486 102.932,77.676 103.426,77.676 103.724,77.378 R14_U_XOR_GATE_32.1@103.724,77.328 103.874,77.478 103.874,78.044 104.128,78.298 105.644,78.298 105.832,78.486 Q10_U_XOR_GATE_32.2@105.832,80.788
NetQ11_U_XOR_GATE_00_1: Q11_U_XOR_GATE_00.1 R15_U_XOR_GATE_00.2 | length 2.7
  Top Layer w0.254: R15_U_XOR_GATE_00.2@68.256,114.092 68.256,114.089 68.554,113.791 70.397,113.791 Q11_U_XOR_GATE_00.1@70.67,113.518
NetQ11_U_XOR_GATE_02_1: Q11_U_XOR_GATE_02.1 R15_U_XOR_GATE_02.2 | length 2.7
  Top Layer w0.254: R15_U_XOR_GATE_02.2@67.468,84.47 67.468,84.467 67.766,84.169 69.609,84.169 Q11_U_XOR_GATE_02.1@69.882,83.896
NetQ11_U_XOR_GATE_32_1: Q11_U_XOR_GATE_32.1 R15_U_XOR_GATE_32.2 | length 2.7
  Top Layer w0.254: R15_U_XOR_GATE_32.2@97.912,84.328 97.912,84.325 98.21,84.027 100.053,84.027 Q11_U_XOR_GATE_32.1@100.326,83.754
NetQ13_U_XOR_GATE_00_1: Q13_U_XOR_GATE_00.1 R16_U_XOR_GATE_00.2 | length 4
  Top Layer w0.254: R16_U_XOR_GATE_00.2@68.256,112.314 68.256,112.264 70.416,110.104 Q13_U_XOR_GATE_00.1@70.416,109.2
NetQ13_U_XOR_GATE_02_1: Q13_U_XOR_GATE_02.1 R16_U_XOR_GATE_02.2 | length 4
  Top Layer w0.254: R16_U_XOR_GATE_02.2@67.468,82.692 67.468,82.642 69.628,80.482 Q13_U_XOR_GATE_02.1@69.628,79.578
NetQ13_U_XOR_GATE_32_1: Q13_U_XOR_GATE_32.1 R16_U_XOR_GATE_32.2 | length 4
  Top Layer w0.254: R16_U_XOR_GATE_32.2@97.912,82.55 97.912,82.5 100.072,80.34 Q13_U_XOR_GATE_32.1@100.072,79.436
NetY_D1_1: Y_D1.1 Y_RD1.2 | length 2
  Top Layer w0.254: Y_RD1.2@105.126,100.838 105.391,100.573 105.391,99.321 Y_D1.1@105.664,99.048
NetY_D1_2: Y_D1.2 Y_Q1.3 | length 5.8
  Top Layer w0.254: Y_D1.2@105.664,97.548 106.51,97.548 107.046,97.012 107.046,93.222 Y_Q1.3@106.776,92.952
NetY_D2_U_NOR_GATE_01_1: Y_D2_U_NOR_GATE_01.1 Y_RD2_U_NOR_GATE_01.2 | length 9
  Top Layer w0.254: Y_RD2_U_NOR_GATE_01.2@75.088,104.282 75.23,104.14 76.827,104.14 78.201,102.766 78.201,98.583 Y_D2_U_NOR_GATE_01.1@77.42,97.802
NetY_D2_U_NOR_GATE_01_2: Y_D2_U_NOR_GATE_01.2 Y_Q2_U_NOR_GATE_01.3 | length 4.2
  Top Layer w0.254: Y_Q2_U_NOR_GATE_01.3@76.47,103.108 76.47,100.252 Y_D2_U_NOR_GATE_01.2@77.42,99.302
NetY_D2_U_NOR_GATE_10_1: Y_D2_U_NOR_GATE_10.1 Y_RD2_U_NOR_GATE_10.2 | length 9
  Top Layer w0.254: Y_RD2_U_NOR_GATE_10.2@89.312,104.536 89.454,104.394 91.051,104.394 92.425,103.02 92.425,98.837 Y_D2_U_NOR_GATE_10.1@91.644,98.056
NetY_D2_U_NOR_GATE_10_2: Y_D2_U_NOR_GATE_10.2 Y_Q2_U_NOR_GATE_10.3 | length 4.2
  Top Layer w0.254: Y_Q2_U_NOR_GATE_10.3@90.694,103.362 90.694,100.506 Y_D2_U_NOR_GATE_10.2@91.644,99.556
NetY_D2_U_NOR_GATE_20_1: Y_D2_U_NOR_GATE_20.1 Y_RD2_U_NOR_GATE_20.2 | length 9
  Top Layer w0.254: Y_RD2_U_NOR_GATE_20.2@90.566,119.268 90.708,119.126 92.305,119.126 93.679,117.752 93.679,113.569 Y_D2_U_NOR_GATE_20.1@92.898,112.788
NetY_D2_U_NOR_GATE_20_2: Y_D2_U_NOR_GATE_20.2 Y_Q2_U_NOR_GATE_20.3 | length 4.2
  Top Layer w0.254: Y_Q2_U_NOR_GATE_20.3@91.948,118.094 91.948,115.238 Y_D2_U_NOR_GATE_20.2@92.898,114.288
NetY_D2_U_NOR_GATE_30_1: Y_D2_U_NOR_GATE_30.1 Y_RD2_U_NOR_GATE_30.2 | length 9
  Top Layer w0.254: Y_RD2_U_NOR_GATE_30.2@104.044,119.268 104.186,119.126 105.783,119.126 107.157,117.752 107.157,113.569 Y_D2_U_NOR_GATE_30.1@106.376,112.788
NetY_D2_U_NOR_GATE_30_2: Y_D2_U_NOR_GATE_30.2 Y_Q2_U_NOR_GATE_30.3 | length 4.2
  Top Layer w0.254: Y_Q2_U_NOR_GATE_30.3@105.426,118.094 105.426,115.238 Y_D2_U_NOR_GATE_30.2@106.376,114.288
NetY_D3_1: Y_D3.1 Y_RD3.2 | length 1.9
  Top Layer w0.254: Y_RD3.2@90.186,78.536 90.484,78.238 91.161,78.238 91.167,78.232 Y_D3.1@91.948,78.232
NetY_D3_2: Y_D3.2 Y_Q3.3 | length 2.9
  Top Layer w0.254: Y_D3.2@91.948,79.732 92.186,79.97 Y_Q3.3@92.186,82.488
NetY_D4_U_XOR_GATE_00_1: Y_D4_U_XOR_GATE_00.1 Y_RD4_U_XOR_GATE_00.2 | length 1.8
  Top Layer w0.254: Y_D4_U_XOR_GATE_00.1@77.278,106.98 77.37,107.072 Y_RD4_U_XOR_GATE_00.2@77.37,108.758
NetY_D4_U_XOR_GATE_00_2: Y_D4_U_XOR_GATE_00.2 Y_Q4_U_XOR_GATE_00.3 | length 14.4
  Top Layer w0.254: Y_Q4_U_XOR_GATE_00.3@78.282,119.852 78.282,117.094 v1(79.044,116.332) ; Y_D4_U_XOR_GATE_00.2@78.778,106.98 80.387,108.589 80.387,111.129 v1(79.502,112.014)
  Bottom Layer w0.254: v1(79.044,116.332) 79.502,115.874 v1(79.502,112.014)
NetY_D4_U_XOR_GATE_02_1: Y_D4_U_XOR_GATE_02.1 Y_RD4_U_XOR_GATE_02.2 | length 1.8
  Top Layer w0.254: Y_D4_U_XOR_GATE_02.1@76.49,77.358 76.582,77.45 Y_RD4_U_XOR_GATE_02.2@76.582,79.136
NetY_D4_U_XOR_GATE_02_2: Y_D4_U_XOR_GATE_02.2 Y_Q4_U_XOR_GATE_02.3 | length 14.2
  Top Layer w0.254: Y_Q4_U_XOR_GATE_02.3@77.494,90.23 77.494,87.472 v1(78.256,86.71) ; Y_D4_U_XOR_GATE_02.2@77.99,77.358 79.395,78.763 79.395,80.835 79.067,81.163 79.067,82.039 v1(78.714,82.392)
  Bottom Layer w0.254: v1(78.256,86.71) 78.714,86.252 v1(78.714,82.392)
NetY_D4_U_XOR_GATE_32_1: Y_D4_U_XOR_GATE_32.1 Y_RD4_U_XOR_GATE_32.2 | length 1.8
  Top Layer w0.254: Y_D4_U_XOR_GATE_32.1@106.934,77.216 107.026,77.308 Y_RD4_U_XOR_GATE_32.2@107.026,78.994
NetY_D4_U_XOR_GATE_32_2: Y_D4_U_XOR_GATE_32.2 Y_Q4_U_XOR_GATE_32.3 | length 14.2
  Top Layer w0.254: Y_Q4_U_XOR_GATE_32.3@107.938,90.088 107.938,87.33 v1(108.7,86.568) ; Y_D4_U_XOR_GATE_32.2@108.434,77.216 109.839,78.621 109.839,79.963 109.511,80.291 109.511,81.897 v1(109.158,82.25)
  Bottom Layer w0.254: v1(108.7,86.568) 109.158,86.11 v1(109.158,82.25)
NetY_Q1_1: Y_Q1.1 Y_R1.1 | length 2.3
  Top Layer w0.254: Y_Q1.1@104.776,93.902 104.826,93.902 105.874,94.95 105.874,95.272 Y_R1.1@106.172,95.57
NetY_Q2_U_NOR_GATE_01_1: Y_Q2_U_NOR_GATE_01.1 Y_R2_U_NOR_GATE_01.1 | length 2.3
  Top Layer w0.254: Y_R2_U_NOR_GATE_01.1@73.788,102.504 74.086,102.206 74.472,102.206 75.52,101.158 Y_Q2_U_NOR_GATE_01.1@75.52,101.108
NetY_Q2_U_NOR_GATE_10_1: Y_Q2_U_NOR_GATE_10.1 Y_R2_U_NOR_GATE_10.1 | length 2.3
  Top Layer w0.254: Y_R2_U_NOR_GATE_10.1@88.012,102.758 88.31,102.46 88.696,102.46 89.744,101.412 Y_Q2_U_NOR_GATE_10.1@89.744,101.362
NetY_Q2_U_NOR_GATE_20_1: Y_Q2_U_NOR_GATE_20.1 Y_R2_U_NOR_GATE_20.1 | length 2.3
  Top Layer w0.254: Y_R2_U_NOR_GATE_20.1@89.266,117.49 89.564,117.192 89.95,117.192 90.998,116.144 Y_Q2_U_NOR_GATE_20.1@90.998,116.094
NetY_Q2_U_NOR_GATE_30_1: Y_Q2_U_NOR_GATE_30.1 Y_R2_U_NOR_GATE_30.1 | length 2.3
  Top Layer w0.254: Y_R2_U_NOR_GATE_30.1@102.744,117.49 103.042,117.192 103.428,117.192 104.476,116.144 Y_Q2_U_NOR_GATE_30.1@104.476,116.094
NetY_Q3_1: Y_Q3.1 Y_R3.1 | length 1.8
  Top Layer w0.254: Y_R3.1@89.916,85.14 89.916,83.708 Y_Q3.1@90.186,83.438
NetY_Q4_U_XOR_GATE_00_1: Y_Q4_U_XOR_GATE_00.1 Y_R4_U_XOR_GATE_00.1 | length 2.1
  Top Layer w0.254: Y_R4_U_XOR_GATE_00.1@75.734,119.06 76.032,118.762 76.472,118.762 77.332,117.902 Y_Q4_U_XOR_GATE_00.1@77.332,117.852
NetY_Q4_U_XOR_GATE_02_1: Y_Q4_U_XOR_GATE_02.1 Y_R4_U_XOR_GATE_02.1 | length 2.1
  Top Layer w0.254: Y_R4_U_XOR_GATE_02.1@74.946,89.438 75.244,89.14 75.684,89.14 76.544,88.28 Y_Q4_U_XOR_GATE_02.1@76.544,88.23
NetY_Q4_U_XOR_GATE_32_1: Y_Q4_U_XOR_GATE_32.1 Y_R4_U_XOR_GATE_32.1 | length 2.1
  Top Layer w0.254: Y_R4_U_XOR_GATE_32.1@105.39,89.296 105.688,88.998 106.128,88.998 106.988,88.138 Y_Q4_U_XOR_GATE_32.1@106.988,88.088

## Polygon pours and split planes (outlines as drawn)
GND on Layer 1 "GND_L02_P006" (solid, pour order 6): 59.055,121.285 113.665,121.285 113.665,74.93 59.055,74.93
+5 on Layer 2 "+5_L03_P008" (solid, pour order 8): 59.055,121.285 113.665,121.285 113.665,74.93 59.055,74.93

## Silkscreen, mask and mechanical layers (free items; w line width, h text height)
Top Overlay:
  text "DD" at 111.572,119.762 h0.8
  text "09.01.2025" at 111.76,118.364 h0.8 r270
  text "NOR" at 107.6,114.585 h0.8 r270
  text "XOR" at 80.518,114.554 h0.8 r270
  text "NOR" at 94.138,114.046 h0.8 r270
  text "V0.00" at 62.642,112.522 h0.8 r90
  text "ARAF ISRAK" at 60.96,112.456 h0.8 r90
  text "VCC" at 59.944,108.378 h0.8
  text "VCC" at 110.744,108.378 h0.8
  text "AND" at 105.06,104.969 h0.8 r270
  text "IN4" at 62.738,101.158 h0.8
  text "O4" at 108.712,101.092 h0.8
  text "NOR" at 92.868,99.757 h0.8 r270
  text "NOR" at 78.717,99.249 h0.8 r270
  text "IN3" at 62.738,98.618 h0.8
  text "O3" at 108.712,98.552 h0.8
  text "IN2" at 62.738,96.078 h0.8
  text "O2" at 108.712,96.012 h0.8
  text "IN1" at 62.738,93.538 h0.8
  text "O1" at 108.712,93.472 h0.8
  text "OR" at 91.994,87.408 h0.8 r270
  text "GND" at 59.944,86.36 h0.8
  text "GND" at 110.744,86.36 h0.8
  text "XOR" at 110.236,84.232 h0.8 r270
  text "ARAF ISRAK" at 112.014,83.684 h0.8 r270
  text "XOR" at 79.248,83.598 h0.8 r270
  text "V0.00" at 110.586,80.439 h0.8 r270
  text "09.01.2025" at 60.96,77.978 h0.8 r90
  text "DD" at 60.198,76.296 h0.8
Mechanical 1:
  the board outline again, w0.254